# Altium PCB Transmiter_Board.PcbDoc
Units mm, origin at the board's own origin, x right, y up, seen from the top; angles counter-clockwise.
Board outline 134.1 x 52.7 mm, 2 copper layers (Top Layer, Bottom Layer); 44 components, 73 nets, 178 pads, 0 vias.
Unrouted connection lines stored in the file: 1.
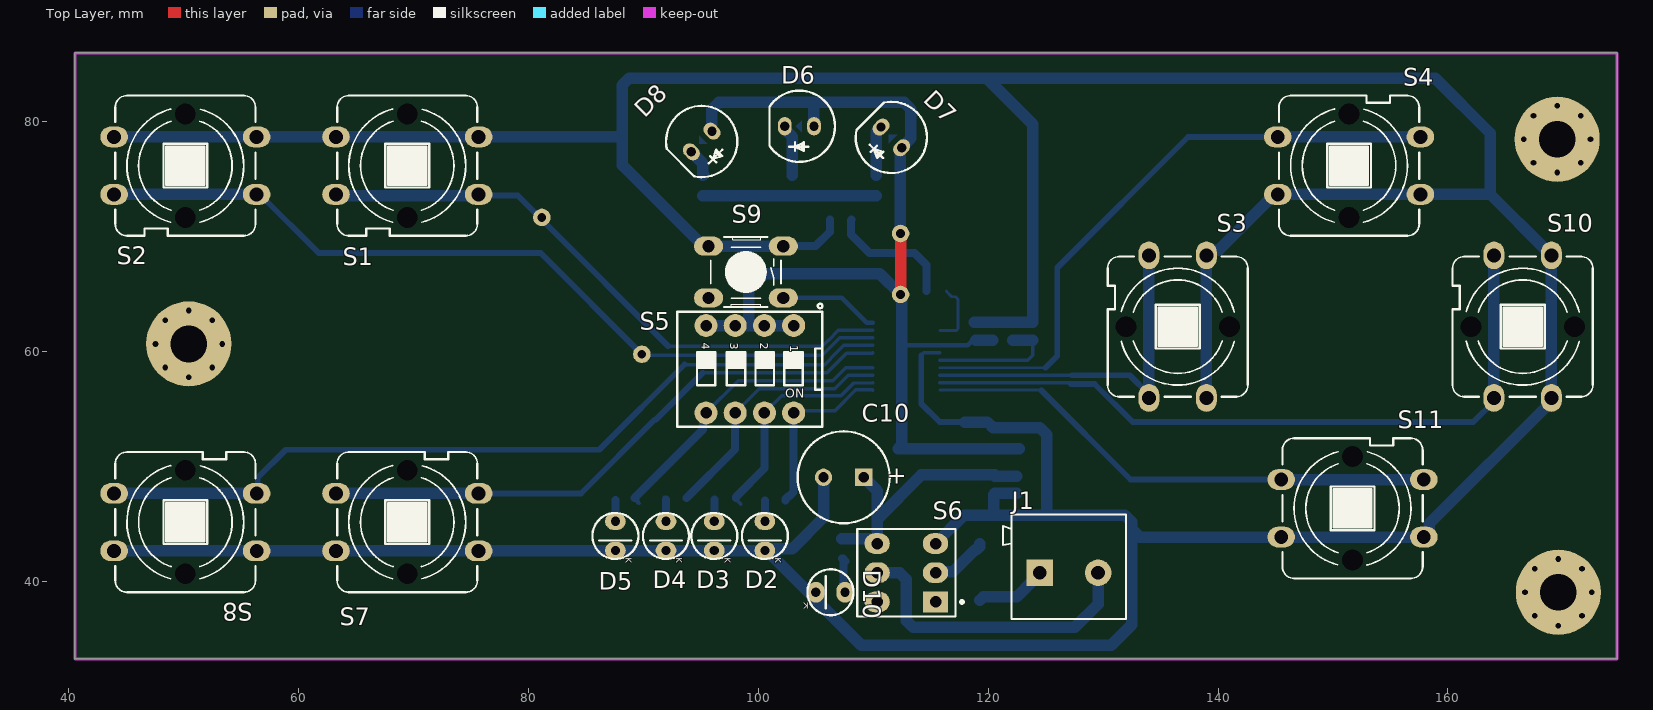
[diagram p0: Top Layer view]
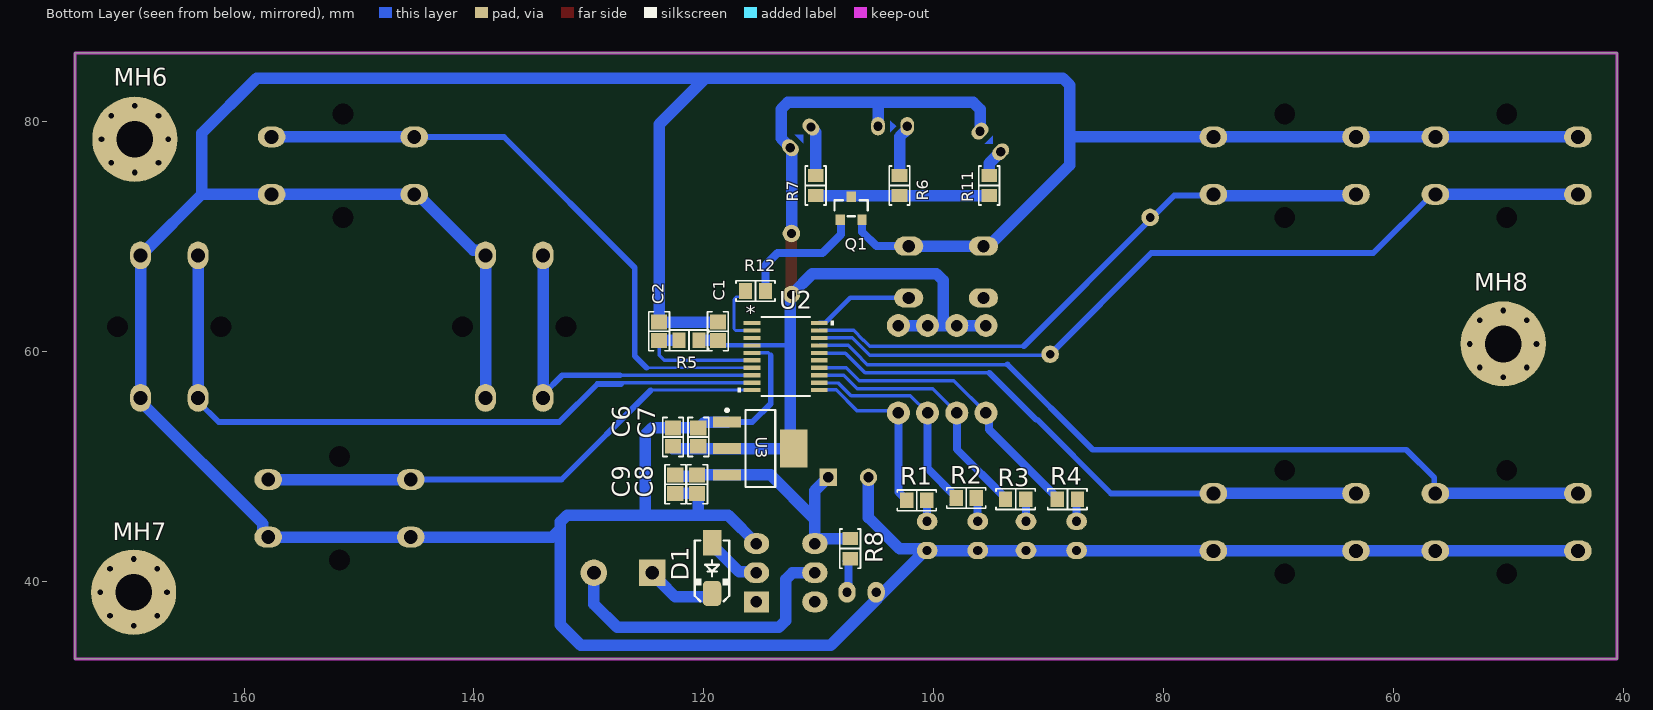
[diagram p1: Bottom Layer view, seen from below]
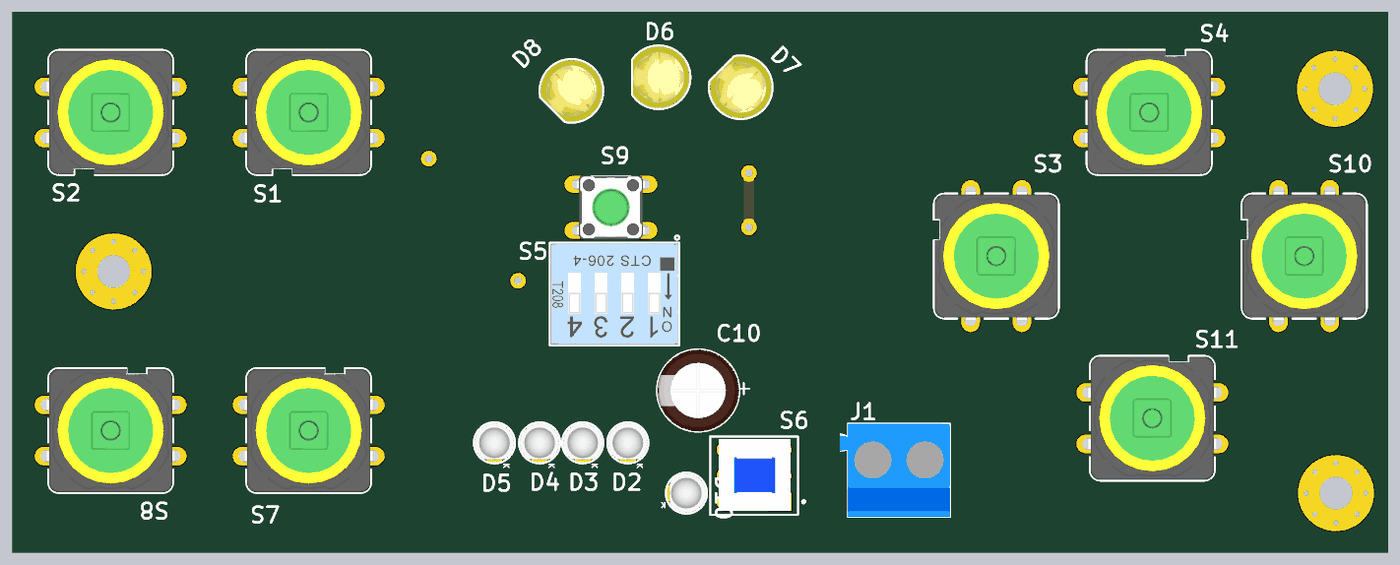
[diagram p2: 3D render of the assembled board from above, using the file's embedded part models]
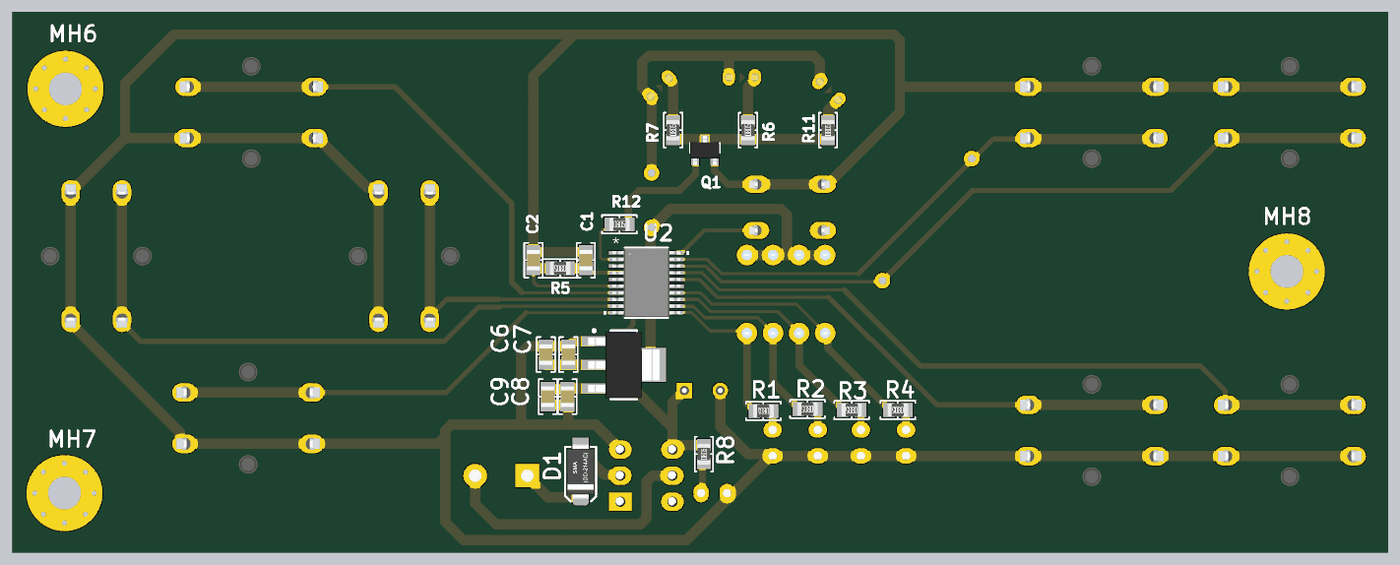
[diagram p3: 3D render of the assembled board from below, using the file's embedded part models]

## Layer stack, top to bottom
Top Solder: solder mask 0.0102, Solder Resist, Dk 3.5
Top Layer: signal copper 0.0356
Dielectric 1: dielectric 0.32, FR-4, Dk 4.8
Bottom Layer: signal copper 0.0356
Bottom Solder: solder mask 0.0102, Solder Resist, Dk 3.5

## Board outline
40.6,33.3 174.7,33.3 174.7,86 40.6,86

## Design rules (kind name [scope] priority, off if disabled: settings)
Clearance [All] p1: gap=0.254 ignorepadtopadclearanceinfootprint=FALSE except(0: Arc-Hole Track-Hole SMDPad-Hole THPad-Hole Via-Hole Fill-Hole Poly-Hole Region-Hole Text-Hole)
PolygonConnect [All] p1: connectstyle=Direct reliefconductorwidth=0.254 reliefentries=4 polygonreliefangle="90 Angle" airgapwidth=0.254
RoutingVias [All] p1: holewidth=0.711 width=1.27 viastyle="Through Hole" minholewidth=0.711 minwidth=1.27 maxholewidth=0.711 maxwidth=1.27
SolderMaskExpansion [All] p1: expansion=0.102
Width [All] p1: maxlimit=10 minlimit=0.254 preferedwidth=0.3
30 further rules are at their usual default settings.

## Components (designator, comment, footprint, x,y, rotation, side; value= is the part's Value field where it differs from the comment)
C1 "0.1µF" "CAP 0805_2012" 118.797,61.8 r270 bottom
C2 "0.1µF" "CAP 0805_2012" 123.897,61.8 r270 bottom
C6 "0.1µF" "CAP 0805_2012" 122.697,52.6 r270 bottom
C7 "100µF" "CAP 0805_2012" 120.497,52.6 r270 bottom
C8 "100µF" "CAP 0805_2012" 120.597,48.5 r90 bottom
C9 "0.1µF" "CAP 0805_2012" 122.497,48.5 r90 bottom
C10 "Capacitor Electrical THD" Cap_3_(3.5mm) 107.447,49.1 r180 top value=1000uf
D1 "1N4007 SMD M7" D_SMA 119.297,41.2 r270 bottom value=1N4007
D2 "LED THD 3mm" "LED THD 3mm (White)" 100.597,44 r270 top
D3 "LED THD 3mm" "LED THD 3mm (White)" 96.197,44 r270 top
D4 "LED THD 3mm" "LED THD 3mm (White)" 91.997,44 r270 top
D5 "LED THD 3mm" "LED THD 3mm (White)" 87.597,44 r270 top
D6 "LED5MM" "LED THD 5mm (Yellow)" 103.597,79.627 r180 top
D7 "LED5MM" "LED THD 5mm (Yellow)" 111.597,78.656 r135 top
D8 "LED5MM" "LED THD 5mm (Yellow)" 95.099,78.302 r225 top
D10 "LED THD 3mm" "LED THD 3mm (White)" 106.297,39.1 r180 top
J1 "Socket Blue 2" "Socket Blue 2" 127.037,40.8 r0 top
MH6 "MH_7.4mmC_3.2mmD" MH_7.4mmC_3.2mmD 169.497,78.5 r180 bottom
MH7 "MH_7.4mmC_3.2mmD" MH_7.4mmC_3.2mmD 169.597,39.1 r180 bottom
MH8 "MH_7.4mmC_3.2mmD" MH_7.4mmC_3.2mmD 50.497,60.7 r180 bottom
Q1 "MMBT2222A-7-F" "DIODES SOT-23-3" 107.197,72.5 r90 bottom
R1 "50 mOhms" "RES 0805_2012" 101.497,47.1 r0 bottom
R2 "50 mOhms" "RES 0805_2012" 97.197,47.3 r0 bottom
R3 "50 mOhms" "RES 0805_2012" 92.897,47.2 r0 bottom
R4 "50 mOhms" "RES 0805_2012" 88.397,47.2 r0 bottom
R5 "1 kOhms" "RES 0805_2012" 121.297,61 r0 bottom
R6 "68 Ohms" "RES 0805_2012" 102.997,74.475 r90 bottom
R7 "68 Ohms" "RES 0805_2012" 110.297,74.475 r90 bottom
R8 "1 kOhms" "RES 0805_2012" 107.297,42.9 r90 bottom
R11 "68 Ohms" "RES 0805_2012" 95.197,74.475 r90 bottom
R12 "1 kOhms" "RES 0805_2012" 115.522,65.3 r180 bottom
S1 "SW_PB4 THD" "SW THD 4 PIN (25) 12X12SKHC"#1 69.497,76.2 r0 top
S2 "SW_PB4 THD" "SW THD 4 PIN (25) 12X12SKHC"#1 50.198,76.2 r0 top
S3 "SW_PB4 THD" "SW THD 4 PIN (25) 12X12SKHC"#1 136.497,62.2 r270 top
S4 "SW_PB4 THD" "SW THD 4 PIN (25) 12X12SKHC"#1 151.397,76.2 r180 top
S5 "DIP Switch 4" "dip switch 4  Blue THD" 99.287,58.5 r270 top
S6 "Double Switch" SWPUST_DPDT_S2 112.897,40.8 r180 top
S7 "SW_PB4 THD" "SW THD 4 PIN (25) 12X12SKHC"#1 69.497,45.2 r180 top
S8 "SW_PB4 THD" "SW THD 4 PIN (25) 12X12SKHC"#2 50.2,45.2 r180 top
S9 "SW_PB4 THD" "SW THD 4 PIN (6)" 98.947,66.95 r180 top
S10 "SW_PB4 THD" "SW THD 4 PIN (25) 12X12SKHC"#1 166.497,62.2 r270 top
S11 "SW_PB4 THD" "SW THD 4 PIN (25) 12X12SKHC"#1 151.697,46.4 r180 top
U2 "STM32G030F6Px" TSSOP20 112.897,59.6 r180 bottom value=Value
U3 "AMS1117-3.3" SOT223-4N 115.097,51.6 r180 bottom

## Footprints (in the part's own frame and the unit in brackets; to place one, negate y for a bottom-side part, rotate by r counter-clockwise, add the part's x,y. Pads: shape width x height; smd on the part's side, far side on the other; paste and mask are expansions set on the pad)
"CAP 0805_2012" [mm] "Chip Capacitor, 2-Leads, Body 2.00x1.20mm, IPC Medium Density"
  rect 1.3x1.4 smd: 1(-0.8,0) 2(0.8,0)
  silkscreen extent -1.7,-0.9 1.7,0.9, body extent -1,-0.64 1,0.64, height 1.26
Cap_3_(3.5mm) [mm] "Capacitor, Electrolytic, Radial; Body 8 x 5 mm (Dia.xH typ); Pin Spacing 3.5 mm (typ) (www.smartw.ir)"
  rect 1.5x1.51 hole 0.9: 1(-1.75,0)
  round 1.5 hole 0.9: 2(1.75,0)
  silkscreen extent -4,-4 4,4, body extent -4,-4 4,4, height 11
D_SMA [mm] "SMA Molded Diode, 2-Leads, Body 4.3x2.7mm, SOD-128 (www.Smartw.ir)"
  rect 2.2x1.6 smd: 1(-2.2,0)
  rrect50% 2.2x1.6 smd: 2(2.2,0)
  silkscreen extent -2.4,-1.5 2.9,1.5, body extent -2.75,-1.4 2.75,1.4, height 2.6
"DIODES SOT-23-3" [mm] "SOT23, 3-Leads, Body 2.90x2.40mm, Pitch 0.95mm, IPC Medium Density"
  rect 0.9x0.8 smd: 1(-1,0.95) 2(-1,-0.95) 3(1,0)
  silkscreen extent -0.7,-1.45 0.7,1.45, body extent -1.41,-1.45 1.41,1.45, height 1.5
"dip switch 4  Blue THD" [mm] "SWITCH DIP 4POS, THD, 2.54mm, YL04 (www.smartw.ir)"
  round 2 / inner round 1.4 / far side round 2 hole 1 mask+0.1: 1(-3.8,3.81) 2(-3.8,1.27) 3(-3.8,-1.27) 4(-3.8,-3.81) 5(3.8,-3.81) 6(3.8,-1.27) 7(3.8,1.27) 8(3.8,3.81)
  silkscreen extent -5.7,-6.3 5,6.31, body extent -4.89,-6.17 4.89,6.17, height 8.14
"LED THD 3mm (White)" [mm] "(www.Smartw.ir)"
  oval 1.5x1.8 hole 0.8: 1(-1.27,0) 2(1.27,0)
  silkscreen extent -2,-2 2,2, body extent -1.9,-1.9 1.6,1.9, height 6.5
"LED THD 5mm (Yellow)" [mm] "(www.Smartw.ir)"
  oval 1.2x1.6 hole 0.8: 1(-1.27,0) 2(1.27,0)
  Bottom Layer region: -0.2,0.5 -0.2,-0.5 0.3,0
  silkscreen extent -3.1,-3.1 2.6,3.1, body extent -3,-3 2.5,3, height 9.14
MH_7.4mmC_3.2mmD [mm]
  round 7.4 hole 3.2: 1(0,0)
  round 0.8 hole 0.5: 10(-2.9,0) 10(-2.051,-2.051) 10(-2.051,2.051) 10(0,-2.9) 10(0,2.9) 10(2.051,-2.051) 10(2.051,2.051) 10(2.9,0)
"RES 0805_2012" [mm] "Chip Resistor, 2-Leads, Body 2.00x1.25mm, IPC Medium Density"
  rect 1.15x1.35 smd: 1(-0.875,0) 2(0.875,0)
  silkscreen extent -1.7,-0.9 1.7,0.9, body extent -1,-0.62 1,0.63, height 0.6
"Socket Blue 2" [mm] "(www.Smartw.ir)"
  rect 2.3x2.3 hole 1.2: 1(-2.54,0)
  round 2.3 hole 1.2: 2(2.54,0)
  silkscreen extent -5.71,-4.01 4.95,5.08, body extent -5.78,-3.99 4.96,5.08, height 12.52
SOT223-4N [mm] "SOT223, 4-Leads, Body 6.7x7.3mm (max), Pitch 2.30mm, IPC Medium Density"
  rect 2.4x0.95 smd: 1(-2.9,2.3) 2(-2.9,0) 3(-2.9,-2.3)
  rect 2.4x3.3 smd: 4(2.9,0)
  silkscreen extent -3.03,-3.35 1.3,3.45, body extent -3.48,-3.25 3.48,3.25, height 1.68
"SW THD 4 PIN (6)" [mm] "Vertical 6.0mm Square Type (Snap-in) SKHH Series; 7.0 mm Height ; 1,000,000 cycles ; 0.98N Force"
  oval 2.54x1.651 hole 1.067: 1(-3.25,2.25) 2(3.25,2.25) 3(-3.25,-2.25) 4(3.25,-2.25)
  silkscreen extent -3.05,-3.05 3.05,3.05, body extent -3.95,-3.1 3.95,3.1, height 7.03
"SW THD 4 PIN (25) 12X12SKHC"#1 [mm] "SWITCH, PUSHBUTTON, THD, SPDT, 12X12X7.3 mm ; 1,000,000 cycles ; 1.27N Force, SKHCBEA010"
  oval 2.4x1.8 hole 1.2 mask+0.1: 1(-6.2,2.5) 2(-6.2,-2.5) 3(6.2,-2.5) 4(6.2,2.5)
  round 0 hole 1.8 unplated mask+0.1: ""(0,-4.5) ""(0,4.5)
  silkscreen extent -6.1,-6.1 6.1,6.1, body extent -7,-6 7,6, height 7.33
"SW THD 4 PIN (25) 12X12SKHC"#2 [mm] "SWITCH, PUSHBUTTON, THD, SPDT, 12X12X7.3 mm ; 1,000,000 cycles ; 1.27N Force, SKHCBEA010"
  oval 2.4x1.8 hole 1.2: 1(-6.2,2.5) 2(-6.2,-2.5) 3(6.2,-2.5) 4(6.2,2.5)
  round 0 hole 1.8 unplated: ""(0,4.5) ""(0,-4.5)
  silkscreen extent -6.1,-6.1 6.1,6.1, body extent -7,-6 7,6, height 7.33
SWPUST_DPDT_S2 [mm] "Switch, Push, DPDT, THD, Straight (www.Smartw.ir)"
  rect 2.2x1.8 hole 1: 1(-2.54,2.54)
  oval 2.2x1.8 hole 1: 2(-2.54,0) 3(-2.54,-2.54) 4(2.54,-2.54) 5(2.54,0) 6(2.54,2.54)
  silkscreen extent -4.96,-3.81 4.28,3.81, body extent -3.55,-3.55 3.45,3.45, height 14
TSSOP20 [mil] "STM32 package, TSSOP20, 6.4 x 4.4mm"
  rect 58x14 smd: 1(-115,115.16) 2(-115,89.57) 3(-115,63.98) 4(-115,38.39) 5(-115,12.8) 6(-115,-12.8) 7(-115,-38.39) 8(-115,-63.98) 9(-115,-89.57) 10(-115,-115.16) 11(115,-115.16) 12(115,-89.57) 13(115,-63.98) 14(115,-38.39) 15(115,-12.8) 16(115,12.8) 17(115,38.39) 18(115,63.98) 19(115,89.57) 20(115,115.16)
  silkscreen extent -164,-135 164,135, body extent -130,-130 130,130, height 47

## Part data
C1 C2 C6 C9: library part AC0805KKX8R9BB104, "CAP CER 0805 10% X8R 50V 100NF", Device Package="0805 (2012 Metric)", Manufacturer=Yageo, Operating Temperature="-55°C ~ 150°C", Ratings=AEC-Q200, Supplier Part Number 1=311-4624-1-ND, Temperature Coefficient=X8R, Tolerance=±10%, Voltage - Rated=50V, Applications=Automotive, Capacitance=0.1µF, ComponentLink1Description=Datasheet, ComponentLink1URL=http://www.yageo.com/documents/recent/AC0805KKX8R9BB104.pdf, ComponentLink2Description="DigiKey Link", ComponentLink2URL=http://digikey.com/product-detail/en/yageo/AC0805KKX8R9BB104/311-4624-1-ND/9699550, LastUpdated="2020-09-02 01:04:19.917000", Lifecycle Status=Active, Minimum Order=1, Mounting Type="Surface Mount, MLCC", Package / Case="0805 (2012 Metric)", Packaging=TapeAndReel, Part Number=AC0805KKX8R9BB104, Part Status=Active, PartId=14076, Price=0.06, Series=AC, Size / Dimension="0.079 L x 0.049 W (2.00mm x 1.25mm)", Supplier 1=DigiKey, Thickness (Max)="0.057 (1.45mm)"
C7 C8: library part GRM21BR60J107ME15L, "CAP CER 100UF 6.3V X5R 0805", Device Package="0805 (2012 Metric)", Manufacturer="Murata Electronics", Operating Temperature="-55°C ~ 85°C", Supplier Part Number 1=490-13981-1-ND, Temperature Coefficient=X5R, Tolerance=±20%, Voltage - Rated=6.3V, Applications="General Purpose", Capacitance=100µF, ComponentLink1Description=Datasheet, ComponentLink1URL=https://search.murata.co.jp/Ceramy/image/img/A01X/G101/ENG/GRM21BR60J107ME15-01.pdf, ComponentLink2Description="DigiKey Link", ComponentLink2URL=http://digikey.com/product-detail/en/murata-electronics/GRM21BR60J107ME15L/490-13981-1-ND/6155811, LastUpdated="2020-09-02 01:04:10.617000", Lifecycle Status=Active, Minimum Order=1, Mounting Type="Surface Mount, MLCC", Package / Case="0805 (2012 Metric)", Packaging=TapeAndReel, Part Number=GRM21BR60J107ME15L, Part Status=Active, PartId=16995, Price=0.61, Series=GRM, Size / Dimension="0.079 L x 0.049 W (2.00mm x 1.25mm)", Supplier 1=DigiKey, Thickness (Max)="0.057 (1.45mm)"
D1: "DIODE, GENERAL PURPOSE, 1000V/1A", ComponentLink1Description="Website Smart World", ComponentLink1URL=https://www.smartw.ir/, ComponentLink2Description=Telegram, ComponentLink2URL=https://t.me/altium_smartw, ComponentLink3Description=Instagram, ComponentLink3URL=https://Instagram.com/smartgw.ir, DatasheetVersion=2021
D6 D7 D8: "LED LIGHTING", Data=16-12-2016, Designer="Abbas Basereh"
MH6 MH7 MH8: "MH_7.4MM Diameter,3.2mm Drill"
Q1: "TRANS NPN 40V 0.6A SMD SOT23-3", Current - Collector (Ic) (Max)=600mA, Current - Collector Cutoff (Max)="10nA (ICBO)", DC Current Gain (hFE) (Min) @ Ic, Vce="100 @ 150mA, 10V", Frequency - Transition=300MHz, Manufacturer="Diodes Incorporated", Operating Temperature="-55°C ~ 150°C (TJ)", Package / Case="TO-236-3, SC-59, SOT-23-3", Power - Max=310mW, Supplier Device Package=SOT-23-3, Supplier Part Number 1=MMBT2222A-FDICT-ND, Voltage - Collector Emitter Breakdown (Max)=40V, ComponentLink1Description=Datasheet, ComponentLink1URL=https://www.diodes.com/assets/Datasheets/ds30041.pdf, ComponentLink2Description="DigiKey Link", ComponentLink2URL=http://digikey.com/product-detail/en/diodes-incorporated/MMBT2222A-7-F/MMBT2222A-FDICT-ND/815723, LastUpdated="2020-09-02 01:30:06.317000", Lifecycle Status=Active, Minimum Order=1, Mounting Type="Surface Mount", Packaging=TapeAndReel, Part Number=MMBT2222A-7-F, Part Status=Active, PartId=84, Price=0.02, Series="Automotive, AEC-Q101", Supplier 1=DigiKey, Transistor Type=NPN, Vce Saturation (Max) @ Ib, Ic="1V @ 50mA, 500mA"
R1 R2 R3 R4: library part CRM0805-FW-R050ELF, "RES 0.05 OHM 1% 1/4W 0805", Device Package="0805 (2012 Metric)", Manufacturer="Bourns Inc.", Operating Temperature="-55°C ~ 155°C", Power (Watts)="0.25W, 1/4W", Supplier Device Package=0805, Supplier Part Number 1=CRM0805-FW-R050ELFCT-ND, Temperature Coefficient=±200ppm/°C, Tolerance=±1%, ComponentLink1Description=Datasheet, ComponentLink1URL=https://www.bourns.com/docs/Product-Datasheets/CRM0805_1206_2010.pdf, ComponentLink2Description="DigiKey Link", ComponentLink2URL=http://digikey.com/product-detail/en/bourns-inc/CRM0805-FW-R050ELF/CRM0805-FW-R050ELFCT-ND/3592903, Composition="Thick Film", Features="Current Sense", Height - Seated (Max)="0.024 (0.60mm)", LastUpdated="2020-09-02 01:15:22.390000", Lifecycle Status=Active, Minimum Order=1, Number of Terminations=2, Package / Case="0805 (2012 Metric)", Packaging=TapeAndReel, Part Number=CRM0805-FW-R050ELF, Part Status=Active, PartId=28469, Price=0.14, Resistance="50 mOhms", Series=CRM0805, Size / Dimension="0.079 L x 0.047 W (2.00mm x 1.20mm)", Supplier 1=DigiKey
R5 R8 R12: library part RNCP0805FTD1K00, "RES 1K OHM 1% 1/4W 0805", Device Package="0805 (2012 Metric)", Manufacturer="Stackpole Electronics Inc", Operating Temperature="-55°C ~ 155°C", Power (Watts)="0.25W, 1/4W", Supplier Device Package=0805, Supplier Part Number 1=RNCP0805FTD1K00CT-ND, Temperature Coefficient=±100ppm/°C, Tolerance=±1%, ComponentLink1Description=Datasheet, ComponentLink1URL=https://www.seielect.com/catalog/sei-rncp.pdf, ComponentLink2Description="DigiKey Link", ComponentLink2URL=http://digikey.com/product-detail/en/stackpole-electronics-inc/RNCP0805FTD1K00/RNCP0805FTD1K00CT-ND/2240568, Composition="Thin Film", Features="Anti-Sulfur, Moisture Resistant", Height - Seated (Max)="0.024 (0.60mm)", LastUpdated="2020-09-02 01:15:23.347000", Lifecycle Status=Active, Minimum Order=1, Number of Terminations=2, Package / Case="0805 (2012 Metric)", Packaging=TapeAndReel, Part Number=RNCP0805FTD1K00, Part Status=Active, PartId=28023, Price=0.01, Resistance="1 kOhms", Series=RNCP, Size / Dimension="0.079 L x 0.049 W (2.00mm x 1.25mm)", Supplier 1=DigiKey
R6 R7 R11: library part CRGP0805F68R, "CRGP 0805 68R 1%", Device Package="0805 (2012 Metric)", Manufacturer="TE Connectivity Passive Product", Operating Temperature="-55°C ~ 155°C", Power (Watts)="0.333W, 1/3W", Supplier Device Package=0805, Supplier Part Number 1=A130463CT-ND, Temperature Coefficient=±200ppm/°C, Tolerance=±1%, ComponentLink1Description=Datasheet, ComponentLink1URL=https://www.te.com/commerce/DocumentDelivery/DDEController?Action=srchrtrv&DocNm=9-1773463-9&DocType=DS&DocLang=English, ComponentLink2Description="DigiKey Link", ComponentLink2URL=http://digikey.com/product-detail/en/te-connectivity-passive-product/CRGP0805F68R/A130463CT-ND/8578295, Composition="Thick Film", Features="Pulse Withstanding", Height - Seated (Max)="0.026 (0.65mm)", LastUpdated="2020-09-02 01:15:21.913000", Lifecycle Status=Active, Minimum Order=1, Number of Terminations=2, Package / Case="0805 (2012 Metric)", Packaging=TapeAndReel, Part Number=CRGP0805F68R, Part Status=Active, PartId=28711, Price=0.02, Resistance="68 Ohms", Series=CRGP, Size / Dimension="0.079 L x 0.049 W (2.00mm x 1.25mm)", Supplier 1=DigiKey
S5: "4 BIT DIP Switch", ComponentLink1Description="Website Smart World", ComponentLink1URL=https://www.smartw.ir/, ComponentLink2Description=Telegram, ComponentLink2URL=https://t.me/altium_smartw, ComponentLink3Description=Instagram, ComponentLink3URL=https://Instagram.com/smartgw.ir, DatasheetVersion=2021
S6: library part "SW DPDT", "DPDT Switch", ComponentLink1Description="Website Smart World", ComponentLink1URL=https://www.smartw.ir/, ComponentLink2Description=Telegram, ComponentLink2URL=https://t.me/altium_smartw, ComponentLink3Description=Instagram, ComponentLink3URL=https://Instagram.com/smartgw.ir, DatasheetVersion=2021
U2: "The STM32G030x6/x8 mainstream microcontrollers are based on high-performance Arm® Cortex®-M0+ 32-bit RISC core operating at up to 64 MHz frequency.  / 32K Flash and 8K RAM with 20pin TSSOP 6.4x4.4mm package", Manufacturer_Part_Number=stm32g0_tssop20_t1, Copyright="Copyright (C) 2018 Accelerated Designs. All rights reserved", RefDes=RefDes, TYPE=DEV, Vendor=STMicroelectronics
U3: library part CMP-209535-000001-1, "LDO Voltage Regulators 1A, 3.3V", Dropout Voltage=1.1V, Manufacturer="Advanced Monolithic Systems", Max Junction Temp=+125°C, Max Power Dissipation=1.2W, Max Supply Voltage=15V, Nominal Supply Current=5mA, Output Current=1A, Output Voltage=3.3V, Package=AMS1117, Temperature="-40°C to +125°C", Temperature Range Low=-40°C, Automotive=No, Category=IC, ComponentLink2Description=Datasheet, ComponentLink2URL=http://www.advanced-monolithic.com/pdf/ds1117.pdf, Device Class L1="Integrated Circuits (ICs)", Device Class L2="Power Management ICs", Device Class L3="Voltage Regulators - Linear", Height=1.8mm, Ipc Land Pattern Name=SOT229P700X180-4, Lead Free=Yes, Manufacturer Part Number=AMS1117-3.3, Number Of Outputs=1, Octopart=https://octopart.com/ams1117-3.3-advanced+monolithic+systems-25899300, Output Type=Fixed, RoHS=TRUE, Standoff Height=0.64mm, Temperature Range High=+125°C
C10 D2 D3 D4 D5 D10 S1 S2 S3 S4 S7 S8 S9 S10 S11: ComponentLink1Description="Website Smart World", ComponentLink1URL=https://www.smartw.ir/, ComponentLink2Description=Telegram, ComponentLink2URL=https://t.me/altium_smartw, ComponentLink3Description=Instagram, ComponentLink3URL=https://Instagram.com/smartgw.ir, DatasheetVersion=2021
J1: ComponentLink1Description="Website Smart World", ComponentLink1URL=https://www.smartw.ir/*, ComponentLink2Description=Telegram, ComponentLink2URL=https://t.me/altium_smartw, ComponentLink3Description=Instagram, ComponentLink3URL=https://Instagram.com/smartgw.ir, DatasheetVersion=2021

## Free pads (board coordinates)
  round 1.524 hole 0.762: 2(112.397,70.3) 3(112.397,65) 4(89.897,59.8) 5(81.197,71.7)

## Nets (pads, with @x,y where several pads share a name; then routed paths per layer and width w, separated by ;. In a path a pad name is that pad's centre, name@x,y a point inside that pad or via, vN(x,y) a via of type N, cw(c..) or ccw(c..) an arc to the next point about the centre after c; other vN are vias at no path point)
+POWER: 
+VBAT: C8.2 C9.2 C10.1 R8.2 S6.4 U3.3 | length 23.4
  Bottom Layer w1: R8.2 S6.4@110.357,43.775 ; C10.1 109.447,48.85 109.447,48.845 110.357,47.935 110.357,45.46 ; S6.4@109.94,43.34 S6.4 S6.4@110.357,43.775 ; C8.2@120.597,49.2 C9.2@122.497,49.2 ; C8.2 U3.3 114.197,49.3 110.357,45.46 ; S6.4@110.357,43.775 110.357,45.46
-Power: 
A: S8.2 S8.3 U2.17 | length 72.1
  Bottom Layer w0.3: 93.597,58.9 105.797,58.9 106.861,59.964 107.472,60.575 U2.17
  Bottom Layer w0.5: S8.2 56.485,47.785 56.485,49.057 58.928,51.5 86.197,51.5 93.597,58.9
  Bottom Layer w1: S8.3 S8.2
add_0: R4.2 S5.5 U2.14 | length 27.2
  Bottom Layer w0.3: R4.2@89.272,47.3 R4.2 89.652,46.82 R4.2@89.52,47.246 ; S5.5@95.222,54.445 S5.5 98.287,57.51 98.297,57.5 106.497,57.5 107.622,58.625 U2.14
  Bottom Layer w0.7: R4.2@89.272,47.3 95.222,53.25 S5.5@95.222,54.445
add_1: R3.2 S5.6 U2.13 | length 22.6
  Bottom Layer w0.3: R3.2 R3.2@93.772,47.3 ; S5.6 100.117,56.8 106.678,56.8 107.853,57.975 U2.13
  Bottom Layer w0.7: R3.2@93.772,47.3 98.017,51.545 S5.6
add_2: R2.2 S5.7 U2.12 | length 19.6
  Bottom Layer w0.3: R2.2 98.072,47.2 R2.2@98.497,46.775 ; S5.7 102.057,56.2 107.213,56.2 108.313,57.3 109.951,57.3 U2.12
  Bottom Layer w0.7: R2.2 98.072,47.4 100.557,49.885 S5.7
add_3: R1.2 S5.8 U2.11 | length 15.7
  Bottom Layer w0.3: S5.8 103.297,54.9 106.697,54.9 108.497,56.7 109.951,56.7 U2.11
  Bottom Layer w0.7: R1.2 102.372,47.2 102.597,47.425 102.687,47.425 103.097,47.835 S5.8
B_1: S3.2 S3.3 U2.8 | length 31.3
  Bottom Layer w0.3: U2.8 127.297,57.975
  Bottom Layer w0.5: 127.297,57.975 132.322,57.975 133.997,56.3 S3.3
  Bottom Layer w1: S3.3@133.997,56.3 S3.2
B_2: S10.2 S10.3 U2.9 | length 63
  Bottom Layer w0.254: S10.3@163.997,55.7 S10.3
  Bottom Layer w0.3: U2.9 120.647,57.325 120.651,57.329 127.11,57.329 127.218,57.221
  Bottom Layer w0.5: 127.218,57.221 129.272,57.221 132.593,53.9 162.197,53.9 S10.3@163.997,55.7
  Bottom Layer w1: S10.3 S10.2
B_3: S4.2 S4.3 U2.7 | length 54.6
  Bottom Layer w0.254: U2.7 124.997,58.625
  Bottom Layer w0.5: 124.997,58.629 126.022,59.654 126.022,67.325 137.397,78.7 S4.3
  Bottom Layer w1: S4.3 S4.2
B_4: S11.2 S11.3 U2.10 | length 45.3
  Bottom Layer w0.254: U2.10 124.622,56.675
  Bottom Layer w0.5: 124.622,56.675 132.397,48.9 S11.3
  Bottom Layer w1: S11.3 S11.2
Buzzer: S9.1 S9.2 U2.20 | length 8.7
  Bottom Layer w0.4: S9.1 107.286,64.7 109.461,62.525 U2.20
D: pad.4 S2.2 S2.3 U2.18 | length 72.4
  Bottom Layer w0.3: pad.4@89.897,59.7 105.597,59.7 107.122,61.225 U2.18
  Bottom Layer w0.5: S2.3@56.698,73.7 61.798,68.6 81.097,68.6 pad.4
  Bottom Layer w0.7: S2.3 S2.3@56.698,73.7
  Bottom Layer w1: S2.2 S2.3
GND: C1.1 C2.1 C6.1 C7.1 C8.1 C9.1 C10.2 D2.2 D3.2 D4.2 D5.2 D10.2 Q1.2 S1.1 S1.4 S2.1 S2.4 S3.1 S3.4 S4.1 S4.4 S6.3 S7.1 S7.4 S8.1 S8.4 S9.3 S9.4 S10.1 S10.4 S11.1 S11.4 U2.5 U3.1 | length 442.7
  Bottom Layer w0.3: 114.197,59.7 114.422,59.925 U2.5
  Bottom Layer w0.5: 114.197,59.7 114.197,55.5 115.797,53.9 U3.1
  Bottom Layer w0.7: S9.3 104.997,69.2 106.247,70.45 Q1.2
  Bottom Layer w1: S2.1 S2.4 S1.1 S1.4 87.997,78.7 88.197,78.9 ; S8.4 S8.1 S7.4 S7.1 ; S7.1@76.066,42.7 87.567,42.7 D5.2 D4.2 D3.2 D2.2 100.747,42.73 108.977,34.5 130.711,34.5 132.497,36.286 132.497,44.6 ; D2.2@101.264,42.893 102.99,42.893 105.697,45.6 C10.2 ; S9.3 S9.4 95.252,69.2 88.197,76.255 88.197,78.9 ; S6.3 117.897,45.8 120.497,45.8 ; U3.1 119.947,53.9 120.447,53.4 C6.1 124.511,53.4 125.097,52.814 125.097,45.8 ; C1.1 C2.1 123.897,79.8 120.197,83.5 119.897,83.8 ; C9.1 C8.1 120.497,47.6 120.497,45.8 ; S3.4 S3.1 ; S3.1@139.366,68.853 140.05,68.853 144.897,73.7 S4.4 S4.1 163.697,73.7 ; S11.1 S11.4 133.197,43.9 132.497,44.6 ; S11.1@158.35,44.27 158.35,45.053 168.997,55.7 S10.4 S10.1 168.997,68.484 168.627,68.853 168.544,68.853 163.697,73.7 ; 88.197,78.9 88.197,83.214 88.783,83.8 119.897,83.8 ; 119.897,83.8 158.897,83.8 163.697,79 163.697,73.7 ; 120.497,45.8 125.097,45.8 ; 125.097,45.8 131.911,45.8 132.497,45.214 132.497,44.6
IR_LED: R12.1 U2.2 | length 5.5
  Bottom Layer w0.254: U2.2 117.248,61.875 117.397,62.024 117.397,64.576 117.175,64.798 116.845,64.798 116.397,65.246 R12.1
motor_1__A_relay: 
motor_1__B_relay: 
motor_1_in_A: 
motor_1_in_B: 
motor_2__A_relay: 
motor_2__B_relay: 
motor_2_in_A: 
motor_2_in_B: 
motor_3__A_relay: 
motor_3__B_relay: 
motor_3_in_A: 
motor_3_in_B: 
NetC5_1: 
NetD1_1: D1.1 S6.2 | length 5.1
  Bottom Layer w0.254: D1.1 D1.1@119.397,43.5
  Bottom Layer w1: S6.2 115.514,40.877 116.954,40.877 118.877,42.8 118.997,42.8 119.27,43.073 D1.1@119.27,43.3
NetD1_2: D1.2 J1.1 | length 6.3
  Bottom Layer w1: D1.2@119.297,38.4 119.597,38.7 122.497,38.7 123.847,40.05 123.847,40.15 J1.1
NetD2_1: D2.1 R1.1 | length 2
  Bottom Layer w0.254: R1.1@100.522,47.2 R1.1 R1.1@100.597,47.075
  Bottom Layer w0.7: D2.1 R1.1@100.597,47.075
NetD3_1: D3.1 R2.1 | length 2.2
  Bottom Layer w0.254: R2.1@96.197,47.175 R2.1 R2.1@96.222,47.4
  Bottom Layer w0.7: D3.1 R2.1@96.197,47.175
NetD4_1: D4.1 R3.1 | length 2.2
  Bottom Layer w0.254: R3.1@91.822,47.4 R3.1 R3.1@91.997,47.175
  Bottom Layer w0.7: D4.1 R3.1@91.997,47.175
NetD5_1: D5.1 R4.1 | length 2
  Bottom Layer w0.254: R4.1 R4.1@87.597,47.125
  Bottom Layer w0.7: D5.1 R4.1@87.597,47.125
NetD6_2: D6.2 R6.2 | length 4.6
  Bottom Layer w1: D6.2 102.327,79.373 102.997,78.703 R6.2 R6.2@102.972,75.375
NetD7_2: D7.2 R7.2 | length 4.4
  Bottom Layer w1: R7.2 110.297,79.097 110.699,79.499 D7.2
NetD8_2: D8.2 R11.2 | length 2.6
  Bottom Layer w1: D8.2 95.197,76.408 R11.2 R11.2@95.262,75.415
NetD9_2: 
NetD10_1: D10.1 R8.1 | length 3.8
  Bottom Layer w0.7: R8.1@107.622,41.8 107.397,42.025 R8.1 107.432,41.89 107.432,39.22 107.567,39.085 D10.1@107.798,38.854
  Bottom Layer w1: D10.1@107.567,39.085 D10.1
NetD11_1: 
NetD12_1: 
NetD13_1: 
NetD14_1: 
NetD15_1: 
NetD16_1: 
NetD16_2: 
NetD17_1: 
NetD17_2: 
NetD18_1: 
NetD19_1: 
NetD20_1: 
NetD20_2: 
NetD21_1: 
NetD22_1: 
NetD22_2: 
NetD23_1: 
NetD23_2: 
NetGS1_2: 
NetJ1_2: J1.2 S6.5 | length 26.8
  Bottom Layer w1: S6.5 112.311,40.8 112.897,40.214 112.897,36.64 113.483,36.054 127.551,36.054 129.577,38.08 J1.2
NetQ1_1: Q1.1 R12.2 | length 11.2
  Bottom Layer w0.7: Q1.1 108.097,71.45 108.097,70.2 109.697,68.6 113.597,68.6 114.647,67.55 R12.2
NetQ1_3: Q1.3 R6.1 R7.1 R11.1 | length 15.1
  Bottom Layer w1: R11.1 R6.1 107.197,73.6 R7.1
NetQ2_1: 
NetQ3_1: 
NetQ4_1: 
NRST: C2.2 R5.2 U2.6 | length 11.3
  Bottom Layer w0.3: U2.6 123.472,59.275 123.897,59.7 C2.2
  Bottom Layer w1: R5.2 C2.2
OUT_1: 
OUT_2: 
OUT_3: 
RX: 
S: S7.2 S7.3 U2.16 | length 51.7
  Bottom Layer w0.3: 95.197,58.2 105.997,58.2 107.697,59.9 109.951,59.9 U2.16
  Bottom Layer w0.5: S7.2 84.597,47.7 90.997,54.1 91.097,54.1 95.197,58.2
  Bottom Layer w1: S7.3 S7.2
VCC: C1.2 C6.2 C7.2 D6.1 D7.1 D8.1 pad.2 pad.3 R5.1 S5.1 S5.2 S5.3 S5.4 U2.4 U3.2 U3.4 | length 96.3
  Top Layer w1: pad.3 pad.2
  Bottom Layer w0.254: 112.497,60.5 112.572,60.575
  Bottom Layer w0.4: 112.572,60.575 U2.4 118.222,60.575 118.797,61.15 C1.2@118.947,61
  Bottom Layer w1: S5.4 S5.3 99.197,62.3 ; D8.1 95.894,79.303 95.894,79.434 95.997,79.537 95.997,81.114 96.583,81.7 104.79,81.7 ; S5.1 S5.2 99.197,62.3 ; D6.1 104.867,81.623 104.79,81.7 ; pad.3 110.597,66.8 99.783,66.8 99.197,66.214 99.197,62.3 ; pad.2 112.375,70.322 112.375,77.638 D7.1 112.495,77.783 113.297,78.585 113.297,81.114 112.711,81.7 104.79,81.7 ; pad.3@112.497,65 112.497,60.5 112.497,51.9 U3.4 U3.2 U3.2@118.672,51.6 ; U3.2@118.772,51.6 C6.2@122.697,51.6 ; C1.2@118.947,61 R5.1
W: pad.5 S1.2 S1.3 U2.19 | length 52.8
  Bottom Layer w0.3: 92.197,60.5 105.597,60.5 106.123,61.026 106.14,61.026 106.988,61.875 U2.19
  Bottom Layer w0.5: S1.2 S1.2@63.397,73.6 ; S1.3@75.597,73.6 S1.3 75.797,73.6 79.097,73.6 81.097,71.6 92.197,60.5
  Bottom Layer w1: S1.2@63.397,73.6 S1.3@75.597,73.6
pads on no net: MH6.1 MH6.10 MH7.1 MH7.10 MH8.1 MH8.10 S1. S2. S3. S4. S6.1 S6.6 S7. S8. S10. S11. U2.1 U2.3 U2.15

## Polygon pours and split planes (outlines as drawn)
no net on Top Layer "NONET_L01_P000" (solid, remove dead copper, pour order 0): 40,86
no net on Top Layer "NONET_L01_P002" (solid, remove dead copper, pour order 2): 40.5,86

## Keep-outs
Keep-Out Layer:
  the board outline again, w0.254

## Other copper
Bottom Layer:
  pour cut-out: 99.421,78.275 95.097,82.6 91.197,78.7 91.147,78.65 91.197,78.6 95.523,74.274
  pour cut-out: 86.693,48.129 89.176,48.129 94.517,53.47 94.517,54.268 93.65,55.135 87.515,49 86.897,49
  pour cut-out: 109.597,56.3 116.197,56.3 116.197,62.9 109.697,62.9 109.597,62.8
  pour cut-out: 110.397,51.6

## Text inside footprints (layer, text, board x,y; h text height)
C10: Top Overlay "+" at 112.922,49.85 h1.5 r180
D2: Top Overlay "K" at 101.497,42.1 h0.51 r270
D3: Top Overlay "K" at 97.097,42.1 h0.51 r270
D4: Top Overlay "K" at 92.897,42.1 h0.51 r270
D5: Top Overlay "K" at 88.497,42.1 h0.51 r270
D10: Top Overlay "K" at 104.397,38.2 h0.51 r180
S5: Top Overlay "4" at 95.087,60.8 h0.7 r270; Top Overlay "3" at 97.587,60.8 h0.7 r270; Top Overlay "2" at 100.187,60.8 h0.7 r270; Top Overlay "1" at 102.787,60.6 h0.7 r270; Top Overlay "ON" at 102.387,56 h0.8
U2: Mechanical 7 "Default Padstyle: RX58Y14D0T" at 121.787,51.218 h1.27; Mechanical 7 "Pin One Padstyle: RX58Y14D0T" at 121.787,49.694 h1.27; Mechanical 7 "Alt 2 Padstyle: OX90Y60D30P" at 121.469,43.598 h1.27; Mechanical 7 "0.176in/4.47mm" at 115.119,65.315 h0.64; Mechanical 7 "0.26in/6.604mm" at 115.119,67.22 h0.64; Mechanical 7 "0.26in/6.604mm" at 107.614,59.283 h0.64; Mechanical 7 "0.026in/0.65mm" at 123.311,61.883 h0.64; Mechanical 7 "0.03in/0.762mm" at 118.04,53.25 h0.64; Mechanical 7 "Alt 1 Padstyle: OX60Y90D30P" at 121.469,45.122 h1.27; Bottom Overlay "*" at 116.389,62.754 h1.27; Mechanical 13 "*" at 115.069,61.556 h1.27